# EAGLE board ZigBee (EAGLE 6.6.0)
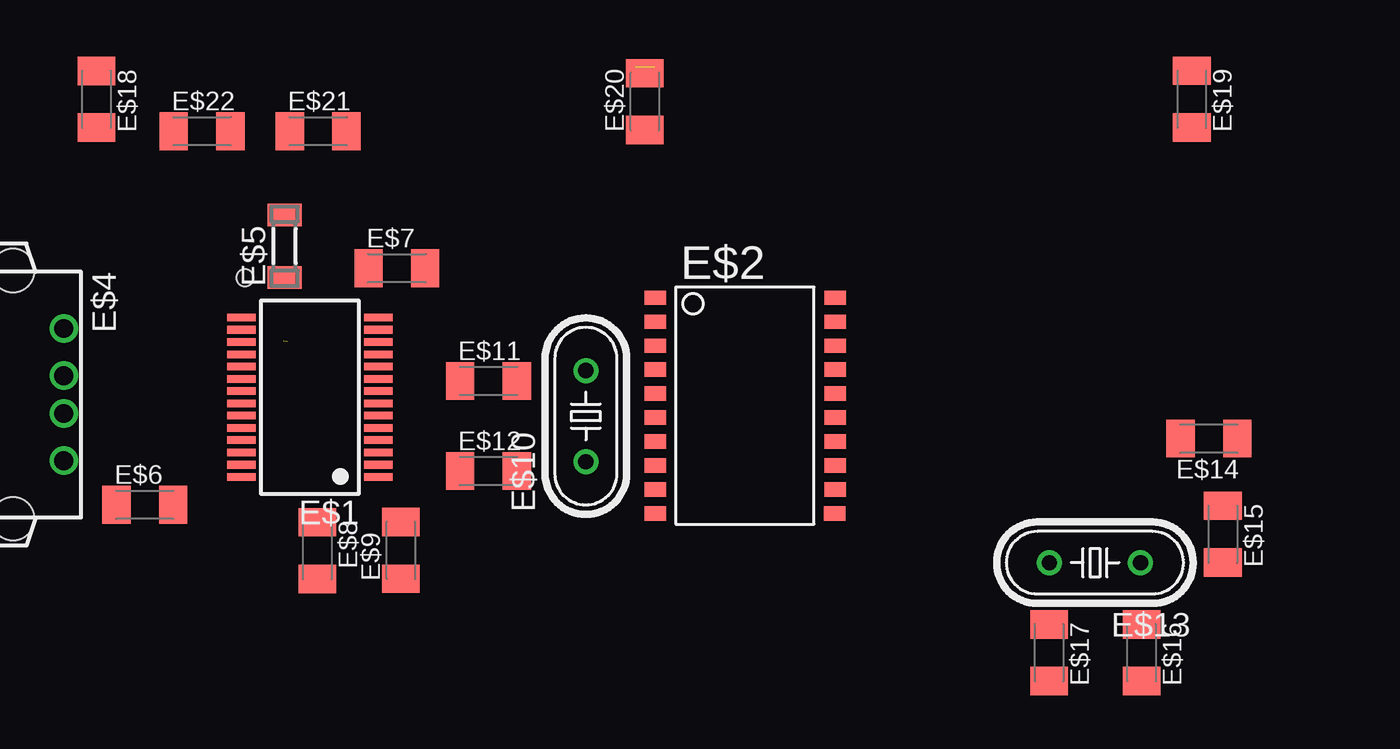
[diagram p0: board, top side]
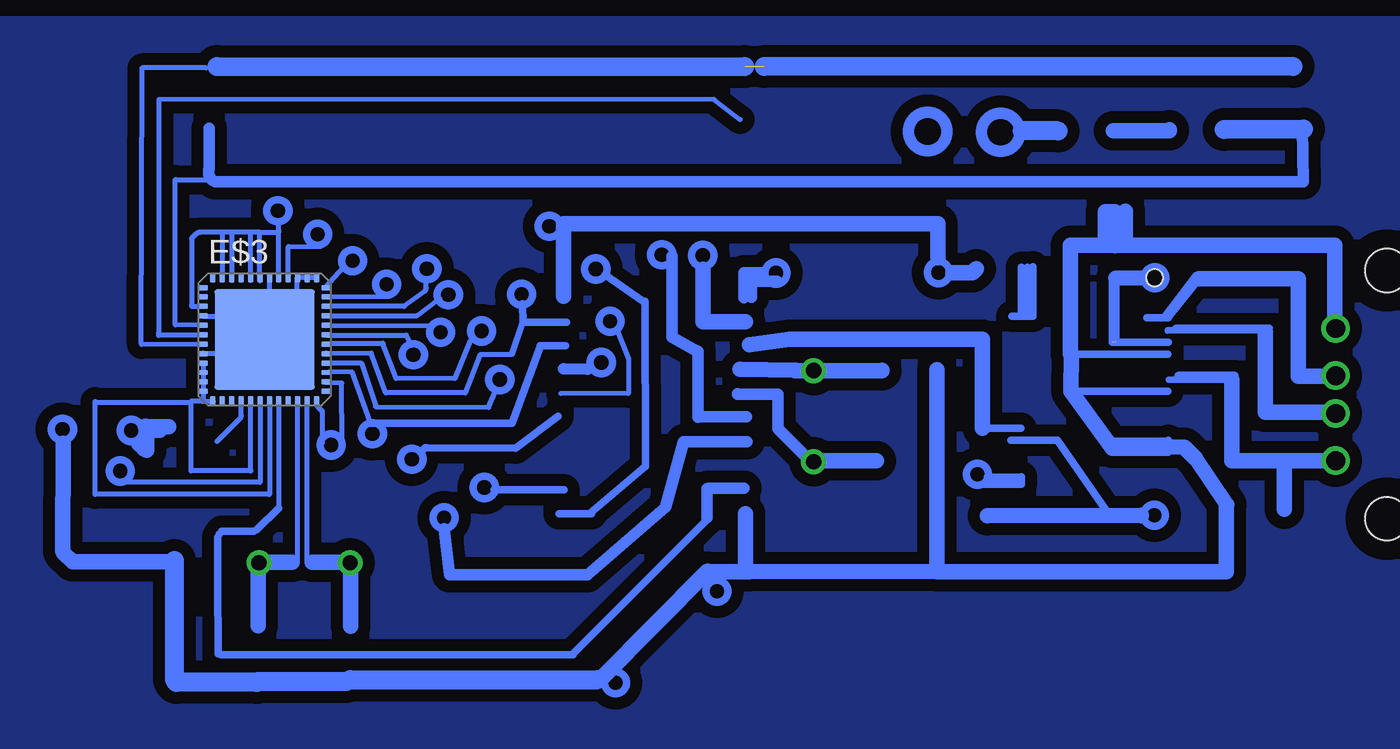
[diagram p1: board, bottom side, seen from below]

No outline drawn. Coordinates in mm, seen from the top.
Copper layers (1*16): Top 0.035mm / dielectric 1.5mm / Bottom 0.035mm
Design rules "default *": minimum track width 10mil, minimum drill 24mil, track to track 25mil, track to pad 25mil, pad to pad 25mil, via to via 25mil, smd to smd 25mil, copper to edge 40mil, drill to drill 8mil, minimum pad ring 10mil, minimum via ring 8mil, stop-mask expansion 4mil, vias tented up to drill 0mil, thermal gap 10mil
Holes 0.9 mm at 22.37,25.14

## Footprints (pad centres in the part's own frame; a part is rotated, then mirrored left to right if it is on the bottom)
SSOP28 = smd 0.4 x 1.5: 1 -4.225,-3.625; 2 -3.575,-3.625; 3 -2.925,-3.625; 4 -2.275,-3.625; 5 -1.625,-3.625; 6 -0.975,-3.625; 7 -0.325,-3.625; 8 0.325,-3.625; 9 0.975,-3.625; 10 1.625,-3.625; 11 2.275,-3.625; 12 2.925,-3.625; 13 3.575,-3.625; 14 4.225,-3.625; 15 4.225,3.625; 16 3.575,3.625; 17 2.925,3.625; 18 2.275,3.625; 19 1.625,3.625; 20 0.975,3.625; 21 0.325,3.625; 22 -0.325,3.625; 23 -0.975,3.625; 24 -1.625,3.625; 25 -2.275,3.625; 26 -2.925,3.625; 27 -3.575,3.625; 28 -4.225,3.625
SO20L = smd 0.762 x 1.143: 1 -5.08,-5.131; 2 -3.81,-5.131; 3 -2.54,-5.131; 4 -1.27,-5.131; 5 0,-5.131; 6 1.27,-5.131; 7 2.54,-5.131; 8 3.81,-5.131; 9 5.08,-5.131; 10 6.35,-5.131; 11 6.35,4.369; 12 5.08,4.394; 13 3.81,4.394; 14 2.54,4.394; 15 1.27,4.394; 16 0,4.394; 17 -1.27,4.394; 18 -2.54,4.394; 19 -3.81,4.394; 20 -5.08,4.394
QFN48 = smd 0.55 x 0.3: 1 -3.275,2.75; 2 -3.275,2.25; 3 -3.275,1.75; 4 -3.275,1.25; 5 -3.275,0.75; 6 -3.275,0.25; 7 -3.275,-0.25; 8 -3.275,-0.75; 9 -3.275,-1.25; 10 -3.275,-1.75; 11 -3.275,-2.25; 12 -3.275,-2.75; 25 3.275,-2.75; 26 3.275,-2.25; 27 3.275,-1.75; 28 3.275,-1.25; 29 3.275,-0.75; 30 3.275,-0.25; 31 3.275,0.25; 32 3.275,0.75; 33 3.275,1.25; 34 3.275,1.75; 35 3.275,2.25; 36 3.275,2.75 | smd 0.3 x 0.55: 13 -2.75,-3.275; 14 -2.25,-3.275; 15 -1.75,-3.275; 16 -1.25,-3.275; 17 -0.75,-3.275; 18 -0.25,-3.275; 19 0.25,-3.275; 20 0.75,-3.275; 21 1.25,-3.275; 22 1.75,-3.275; 23 2.25,-3.275; 24 2.75,-3.275; 37 2.75,3.275; 38 2.25,3.275; 39 1.75,3.275; 40 1.25,3.275; 41 0.75,3.275; 42 0.25,3.275; 43 -0.25,3.275; 44 -0.75,3.275; 45 -1.25,3.275; 46 -1.75,3.275; 47 -2.25,3.275; 48 -2.75,3.275 | smd 5.309 x 5.309: EXP 0,0
USB = drill 1: 1 -3.5,12.99; 2 -1,12.99; 3 1,12.99; 4 3.5,12.99 | hole 2.3: -6.57,10.28; 6.57,10.28
SM-1206 = smd 1.2 x 1.8: 1 -1.65,0; 2 1.65,0
C1206K = smd 1.5 x 2: 1 -1.5,0; 2 1.5,0
HC49/S = drill 0.813: 1 -2.413,0; 2 2.413,0

## Placement (x,y rotation side)
E$1  [SSOP28]  25.81,18.81 90 top
E$2  [SO20L]  49.25,19 270 top
E$3  [QFN48]  69.51,21.87 0 bottom
E$4  [USB]  -0.21,18.95 270 top
E$5  [SM-1206]  24.47,26.81 90 top
E$6  [C1206K]  17.07,13.12 0 top
E$7  [C1206K]  30.42,25.64 0 top
E$8  [C1206K]  26.21,10.69 270 top
E$9  [C1206K]  30.63,10.7 90 top
E$10  [HC49/S]  40.43,17.81 90 top
E$11  [C1206K]  35.27,19.67 0 top
E$12  [C1206K]  35.27,14.9 0 top
E$13  [HC49/S]  67.4,10.05 180 top
E$14  [C1206K]  73.44,16.62 180 top
E$15  [C1206K]  74.18,11.56 270 top
E$16  [C1206K]  69.87,5.28 270 top
E$17  [C1206K]  64.97,5.28 270 top
E$18  [C1206K]  14.51,34.59 270 top
E$19  [C1206K]  72.53,34.6 270 top
E$20  [C1206K]  43.55,34.47 90 top
E$21  [C1206K]  26.25,32.9 0 top
E$22  [C1206K]  20.1,32.9 0 top

## Library data of the parts
E$1 = ftdichip
E$2 = atmel
E$3 = cypress
E$4 = con-amp
E$5 = inductor-neosid
E$6 = rcl
E$7-E$9 E$11 E$12 E$14-E$22 = resistor
E$10 E$13 = crystal

## Tracks (layer width: path | path; a pad name or v marks a point on that pad's centre or on a via)
S$1
  Bottom 0.813: 26.83,21.12 26.82,26.85 12.82,26.85 12.82,22.47
S$2
  Bottom 0.305: 21.64,19.73 18.28,19.73 | 12.71,15.44 12.69,15.46
  Bottom 0.813: 18.28,19.73 18.28,15.44 12.71,15.44
S$3
  Bottom 0.813: 12.8,18.02 16.5,18.02 16.5,22.23
S$4
  Bottom 0.305: 16.25,22.33 21.69,22.33
S$5
  Bottom 0.813: 20.03,25.08 14.77,25.09 14.77,19.93 12.85,19.93
S$6
  Bottom 0.406: 21.64,16.2 24.76,16.19
S$7
  Bottom 0.305: 21.63,22.99 19.75,25.32
S$8
  Bottom 0.305: 21.93,22.99 20.15,25.32
S$9
  Bottom 0.305: 21.69,22.38 21.45,22.38
S$10
  Bottom 0.305: 16.25,22.49 21.28,22.49
S$11
  Bottom 0.305: 18.09,19.99 21.15,19.99
S$12
  Bottom 0.305: 21.15,19.99 arc90 21.44,19.74 21.63,19.74
S$13
  Bottom 0.305: 26.79,21.08 26.86,21.1
  Bottom 0.406: 21.66,21.08 26.79,21.08 | 21.68,19.12 26.8,19.12
  Bottom 0.813: 26.8,19.12 26.79,21.08
S$14
  Bottom 0.305: 21.66,16.51 25.19,16.51
S$15
  Bottom 0.406: 21.63,15.89 21.63,16.53
S$16
  Bottom 0.813: 26.8,19.12 24.6,16.1
S$17  (1 unrouted)
  Bottom 0.406: 24.41,21.78 24.42,25.11 | 24.6,21.76 24.61,25.09
S$18
  Bottom 0.406: 21.64,21.73 24.6,21.73
S$19
  Bottom 0.406: 21.63,23.02 22.79,23.02
S$20
  Bottom 0.406: 21.68,15.89 24.61,15.89
S$21
  Bottom 0.813: 22.37,25.13 24.41,25.11
S$22
  Bottom 0.406: 23.05,12.53 24.73,12.54 27.52,16.54 29.98,16.54
S$23
  Bottom 0.406: 15.5,15.29 15.51,15.3
  Bottom 0.813: 15.5,12.89 15.5,15.29
S$24
  Bottom 0.406: 18.55,13.11 18.55,13.13
  Bottom 0.813: 18.55,13.13 20.24,15.62
S$25
  Bottom 0.813: 21.66,16.19 20.79,16.16 20.18,15.55
S$26
  Bottom 0.813: 24.47,26.84 24.45,26.86 24.45,28.61 24.47,28.63 24.97,28.63 24.97,27.16 24.86,27.05 23.95,27.05 23.93,27.07 23.93,28.65
S$27
  Bottom 0.813: 23.08,12.54 23.06,12.55 31.24,12.53
S$28
  Bottom 0.813: 31.81,25.61 32.02,25.4 33.06,25.4
S$29
  Bottom 0.406: 29.94,23.09 28.82,23.09 28.82,25.73
S$30
  Bottom 0.406: 29.12,23.26 29.12,25.69
S$31
  Bottom 0.406: 29.43,23.26 29.43,25.69
S$32
  Bottom 0.813: 18.56,13.06 18.56,9.58 33.62,9.58
S$33
  Bottom 0.813: 36.81,20.25 arc90 36.84,20.22 41.42,20.22
S$34
  Bottom 0.813: 40.67,15.45 37.11,15.45
S$35
  Bottom 0.813: 41.37,20.25 44.33,20.3
S$36
  Bottom 0.61: 42.34,18.97 44.43,18.97 arc90 44.46,19
S$37
  Bottom 0.813: 33.63,9.57 33.9,9.57 33.91,20.27
S$38
  Bottom 0.406: 29.46,14.58 31.22,14.58 31.22,14.6
S$39
  Bottom 0.406: 29.42,14.6 29.43,14.2 31.43,14.2
S$40
  Bottom 0.813: 46.3,25.6 46.3,22.81 44.05,22.81
S$41
  Bottom 0.406: 31.5,17.18 29.46,17.18
  Bottom 0.813: 31.5,17.18 31.5,21.89 41.7,21.89
S$42
  Bottom 0.813: 43.84,21.59 41.7,21.88
S$43
  Bottom 0.813: 44.05,12.63 44.05,9.58 33.83,9.59
S$44
  Bottom 0.813: 53.69,24.17 53.69,28 33.86,28 33.86,26.19
S$45
  Bottom 0.61: 40.67,15.5 42.32,17.15 42.32,18.97
S$46
  Bottom 0.61: 44.13,24.08 44.13,25.41 43.11,25.41
S$47
  Bottom 0.61: 43.73,24.11 43.73,24.94 42.37,24.94
S$48
  Bottom 0.254: 67.28,18.52 67.28,10.02 65.02,10.03
S$49
  Bottom 0.254: 69.82,10.03 arc-45 69.77,10.01 67.8,10.01 arc-45 67.77,10.08 67.77,18.58
S$50
  Bottom 0.254: 66.77,25.17 67.79,25.17 arc45 67.78,25.15 67.78,24.42 arc45 67.83,24.4 69.27,24.39
S$51
  Bottom 0.254: 72.75,19.11 72.75,20.63
S$52
  Bottom 0.254: 72.76,19.14 72.76,18.61 | 72.76,18.61 72.76,18.59 72.24,18.59 | 72.76,18.61 arc45 72.81,18.59 73.43,18.59 73.42,14.91
S$53
  Bottom 0.254: 72.78,21.15 arc-45 72.73,21.13 71.75,21.13
S$54
  Bottom 0.254: 72.77,23.11 arc-45 72.75,23.1 71.53,23.1
S$55
  Bottom 0.254: 72.82,23.62 73.36,23.62 arc45 73.38,23.67 73.38,27.22 73.13,27.47 arc45 72.95,27.54 71.76,27.54 | 71.75,25.14 arc45 71.76,25.16 71.76,27.54 | 71.24,25 arc45 71.25,25.02 71.25,27.54 | 70.27,25 arc45 70.28,25.02 70.28,27.54 | 71.25,27.54 71.76,27.54 | 70.28,27.54 71.25,27.54 | 69.78,27.55 70.28,27.54 | 69.78,27.55 68.76,27.55 | 69.76,24.98 arc45 69.78,25.03 69.78,27.55
S$56
  Bottom 0.254: 69.26,24.42 69.26,25.23
S$57
  Bottom 0.254: 68.77,25.04 68.77,27.55
S$58
  Bottom 0.254: 68.25,25.05 arc45 68.26,25.07 68.26,26.78 arc45 68.24,26.79 66.56,26.8
S$59
  Bottom 0.254: 65.41,16.35 65.43,19.56
S$60
  Bottom 0.254: 66.32,19.62 arc-45 66.3,19.61 65.43,19.57
S$61
  Bottom 0.254: 73.42,14.91 70.26,14.91 arc-45 70.25,14.93 70.25,18.62
S$62
  Bottom 0.254: 72.03,16.47 70.82,17.68 arc-45 70.75,17.86 70.75,18.7
S$63
  Bottom 0.254: 69.76,18.59 69.76,14.3 arc-45 69.81,14.32 77.33,14.32
S$64
  Bottom 0.254: 66.32,24.62 65.31,25.71
S$65
  Bottom 0.254: 66.29,24.13 arc45 66.31,24.13 62.94,24.15
S$66
  Bottom 0.254: 66.46,16.38 66.46,18.08 66.7,18.32 arc45 66.77,18.5 66.77,18.52
S$67
  Bottom 0.254: 69.26,18.56 69.26,13.68 arc45 69.28,13.67 78.5,13.67 78.5,18.58 arc-45 78.43,18.55 73.36,18.55
S$68
  Bottom 0.254: 68.77,18.53 68.77,12.94 | 69.93,11.78 arc45 70.11,11.71 | 71.93,11.56 arc-45 72,11.38 | 72,9.17 arc45 71.99,9.15
  Bottom 0.406: 68.77,12.94 69.93,11.78 | 70.11,11.71 71.78,11.71 71.93,11.56 | 72,11.38 72,9.17 | 71.99,9.15 71.97,5.24
S$69
  Bottom 1.016: 74.29,10.16 74.29,3.92 arc-45 74.22,3.75 74.18,3.71 69.96,3.71 arc-45 69.86,3.75 65.19,3.75
S$70
  Bottom 0.254: 71.98,5.24 arc-45 71.81,5.17
  Bottom 0.406: 71.81,5.17 63.23,5.17
S$71
  Bottom 0.813: 64.97,10.02 64.97,6.69
S$72
  Bottom 0.813: 69.85,10.05 69.85,6.71
S$73
  Bottom 0.813: 64.95,10.11 arc45 65.02,10.08 67,10.08
S$74
  Bottom 0.813: 69.85,10.1 arc-45 69.78,10.07 68.06,10.07
S$75
  Bottom 1.016: 64.98,3.86 51.86,3.85
S$76
  Bottom 0.813: 51.63,3.95 46.04,9.59 arc45 45.99,9.57 43.83,9.57
S$77
  Bottom 0.254: 74.24,22.64 74.24,30.35 arc-45 74.17,30.32 71.93,30.32
S$78
  Bottom 0.254: 72.75,22.64 74.23,22.63
S$79
  Bottom 0.254: 72.76,21.63 arc90 72.78,21.61 76.04,21.6
S$80
  Bottom 0.254: 76.04,21.63 76.01,36.24
S$81
  Bottom 0.254: 75.13,22.2 75.12,34.57 45.71,34.59
S$82  (1 unrouted)
  Bottom 1.016: 15.04,36.33 43.04,36.32 | 72.04,36.33 44.08,36.32
S$83
  Bottom 0.254: 45.7,34.57 44.33,33.51
S$84
  Bottom 0.254: 72.74,22.12 arc90 72.76,22.1 75.13,22.09
S$85
  Bottom 1.016: 14.48,33.01 18.69,32.98
S$86
  Bottom 1.016: 27.48,32.92 29.39,32.92
S$87
  Bottom 0.61: 14.55,33.08 14.5,30.22
S$88
  Bottom 0.61: 14.5,30.21 72.1,30.21 arc90 72.46,30.9 72.46,33.05
S$89
  Bottom 0.61: 46.56,17.76 46.56,21.24
S$90
  Bottom 0.61: 46.55,21.21 47.93,21.99 47.93,26.27
S$91
  Bottom 0.61: 43.98,17.77 46.57,17.77
S$92
  Bottom 0.406: 53.19,5.18 53.23,5.18 | 53.23,5.18 63.21,5.18 | 53.23,5.18 46.16,12.25 arc-45 46.09,12.43 | 46.09,13.96 arc45 45.99,14
  Bottom 0.61: 46.09,12.43 46.09,13.96 | 45.99,14 44.11,14
S$93
  Bottom 0.254: 62.11,23.62 66.24,23.62
S$94
  Bottom 0.406: 49.36,23.89 49.35,15.16 52.28,12.65 arc45 52.2,12.65 53.91,12.65
S$95
  Bottom 0.254: 66.25,21.09 arc-91 66.21,21.12
S$96
  Bottom 0.254: 53.68,22.79 arc45 53.63,22.77
S$97
  Bottom 0.406: 49.46,23.9 51.47,25.3
S$98
  Bottom 0.254: 62.15,23.62 61.03,24.43 arc-45 60.96,24.61 60.96,25.08
S$99
  Bottom 0.254: 72.63,36.25 76,36.25
S$100
  Bottom 0.254: 68.8,27.56 arc-45 68.77,27.63 68.77,28.13
S$101
  Bottom 0.254: 66.19,21.12 arc45 66.26,21.15
S$102
  Bottom 0.305: 56.42,21.09 55.81,22.8
S$103
  Bottom 0.254: 66.14,20.13 64.89,20.15 63.9,17.42
  Bottom 0.406: 63.9,17.42 56.42,17.42 54.9,21.55
S$104
  Bottom 0.406: 54.91,21.55 53.58,21.55
S$105
  Bottom 0.406: 53.52,22.78 55.82,22.78
S$106
  Bottom 0.61: 53.67,20.32 52.42,20.3
S$107
  Bottom 0.254: 66.27,20.63 arc-45 66.22,20.61 64.37,20.61 63.6,18.29
S$108
  Bottom 0.254: 63.65,18.31 57.67,18.29
S$109
  Bottom 0.254: 66.17,21.61 arc45 66.12,21.63
S$110
  Bottom 0.406: 53.65,13.92 arc45 53.7,13.9 57.37,13.9
S$111
  Bottom 0.254: 66.17,23.1 arc90 66.14,23.13 61.44,23.13 60.22,24.05
S$112
  Bottom 0.254: 66.27,21.12 arc-45 66.22,21.1
S$113
  Bottom 0.254: 66.08,21.12 63.87,21.14 63.1,19.04 58.87,19.04 58.11,21.05
S$114
  Bottom 0.254: 58.63,21.8 59.44,19.8 62.56,19.81 63.26,21.68 arc-62 63.22,21.64 66.06,21.64
S$115
  Bottom 0.254: 56.42,21.07 58.08,21.07
S$116
  Bottom 0.61: 43.95,16.46 47.32,16.46 48.27,12.98 52.4,9.41 59.71,9.41 60.01,11.84
S$117
  Bottom 0.254: 66.27,22.6 60.71,22.62
S$118
  Bottom 0.254: 57.65,18.28 57.23,19.26
S$119
  Bottom 0.254: 66.28,22.1 62.01,22.1 61.73,21.55
S$120
  Bottom 0.254: 50.88,22.45 50.24,20.86 50.25,19.01 53.83,19
S$121
  Bottom 0.406: 61.09,16.07 arc45 60.91,16.14 56.22,16.12 53.97,17.81
S$122
  Bottom 0.406: 55.82,22.75 55.84,23.75
S$123
  Bottom 0.813: 74.32,10.05 arc-45 74.42,10.09 79.68,10.09 80.15,10.56 arc45 80.22,10.73 80.19,16.38
S$124
  Bottom 0.813: 75.07,17.06 75.75,17.06 arc-45 75.77,17.01 75.77,16.01
S$125
  Bottom 0.813: 75.83,17.28 arc-45 75.78,17.26 74.59,17.26
S$126
  Bottom 0.813: 76.18,16.35 75.93,16.1 arc-45 75.76,16.03
S$127
  Bottom 0.813: 24.56,32.91 21.6,32.91 21.6,32.98
S$128
  pour Bottom: 0,0 0,38.81 81.73,38.81 84.32,38.81 84.32,12.33 84.32,0
(copper drawn outside any net)
  shapes: Bottom circle x34